# Altium PCB MSA4.PcbDoc
Units mil, origin at the board's own origin, x right, y up, seen from the top; angles counter-clockwise.
Board outline 3760 x 4510 mil, 4 copper layers (Top Layer 1, Top Layer, Bottom Layer, Bottom Layer 1), stack 23.756 mil thick; 57 components, 65 nets, 424 pads, 183 vias.
Unrouted connection lines stored in the file: 5.
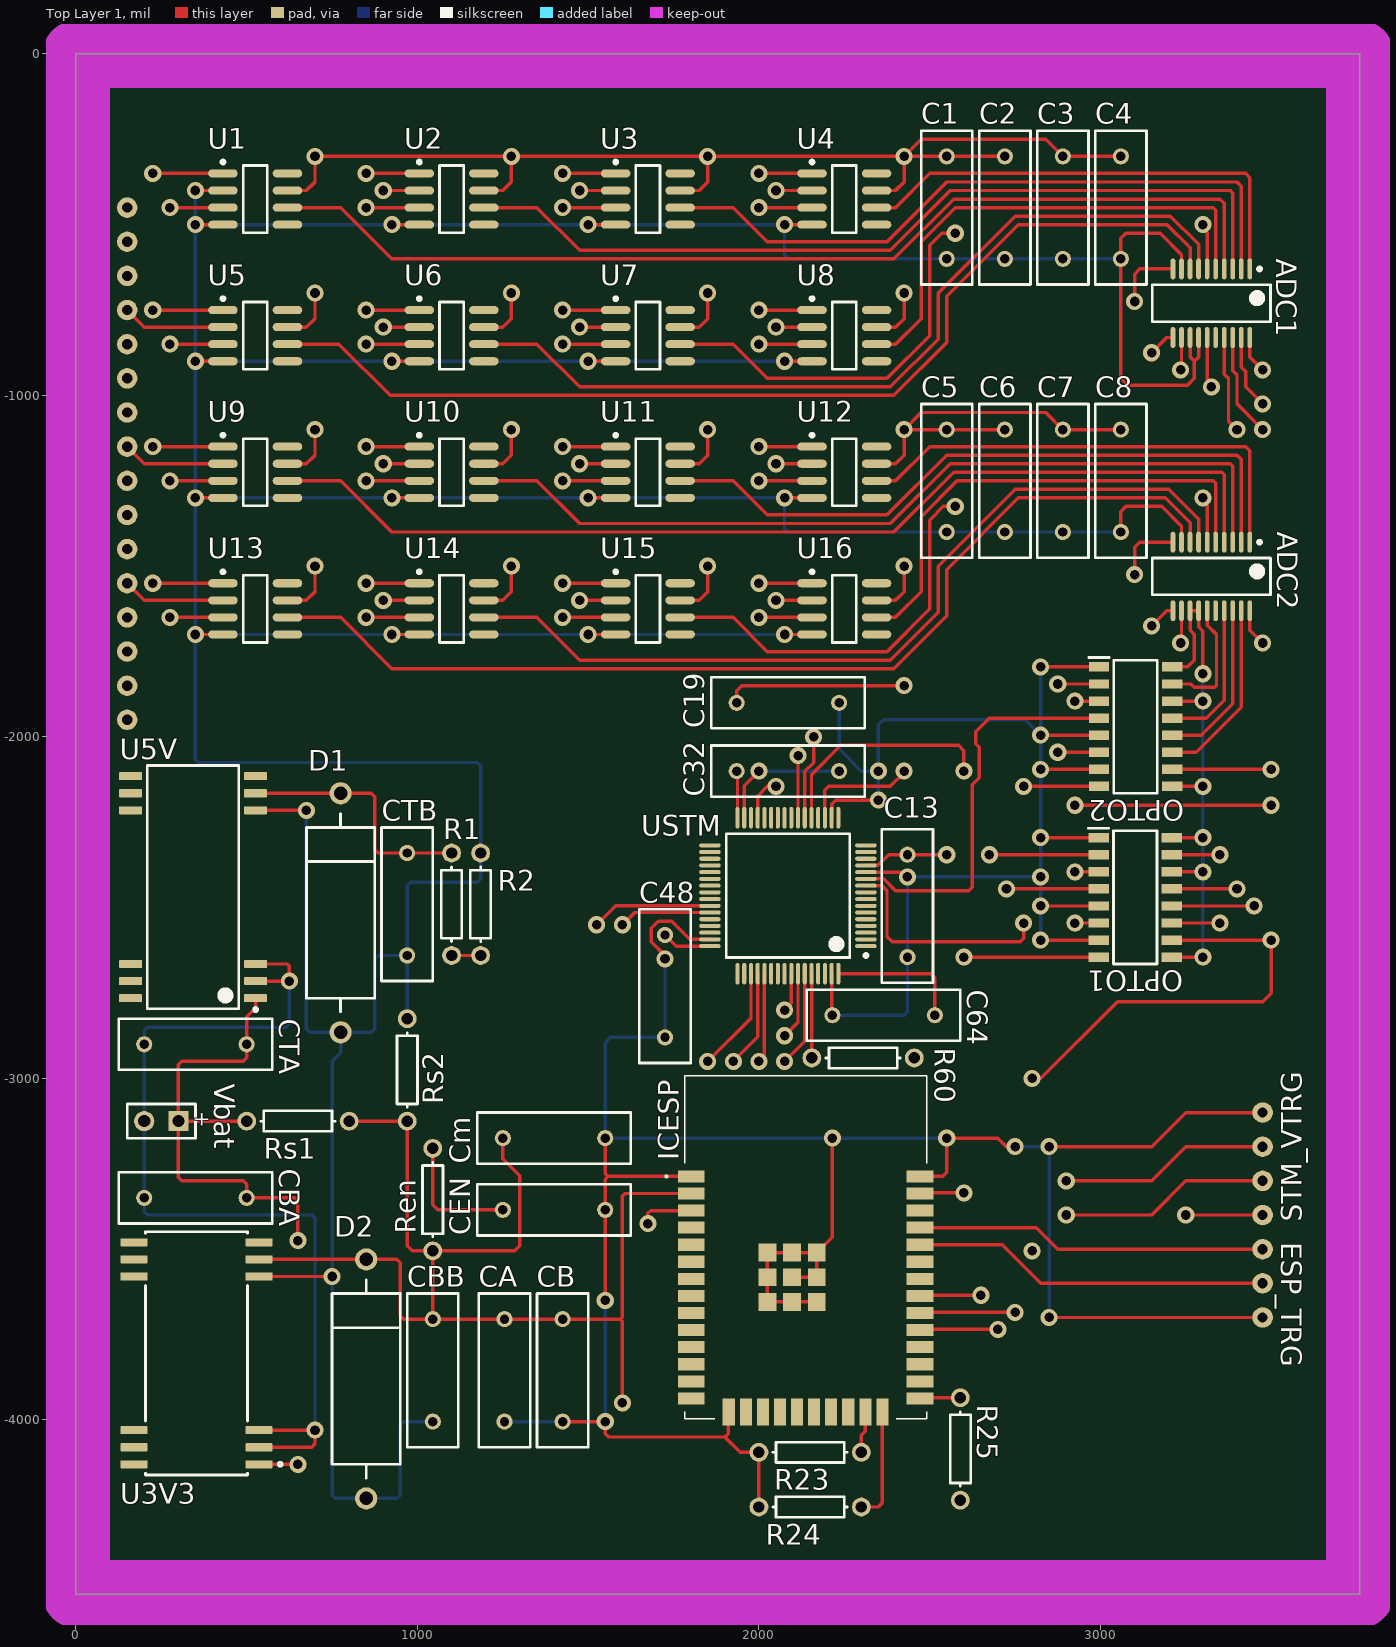
[diagram p0: Top Layer 1 view]
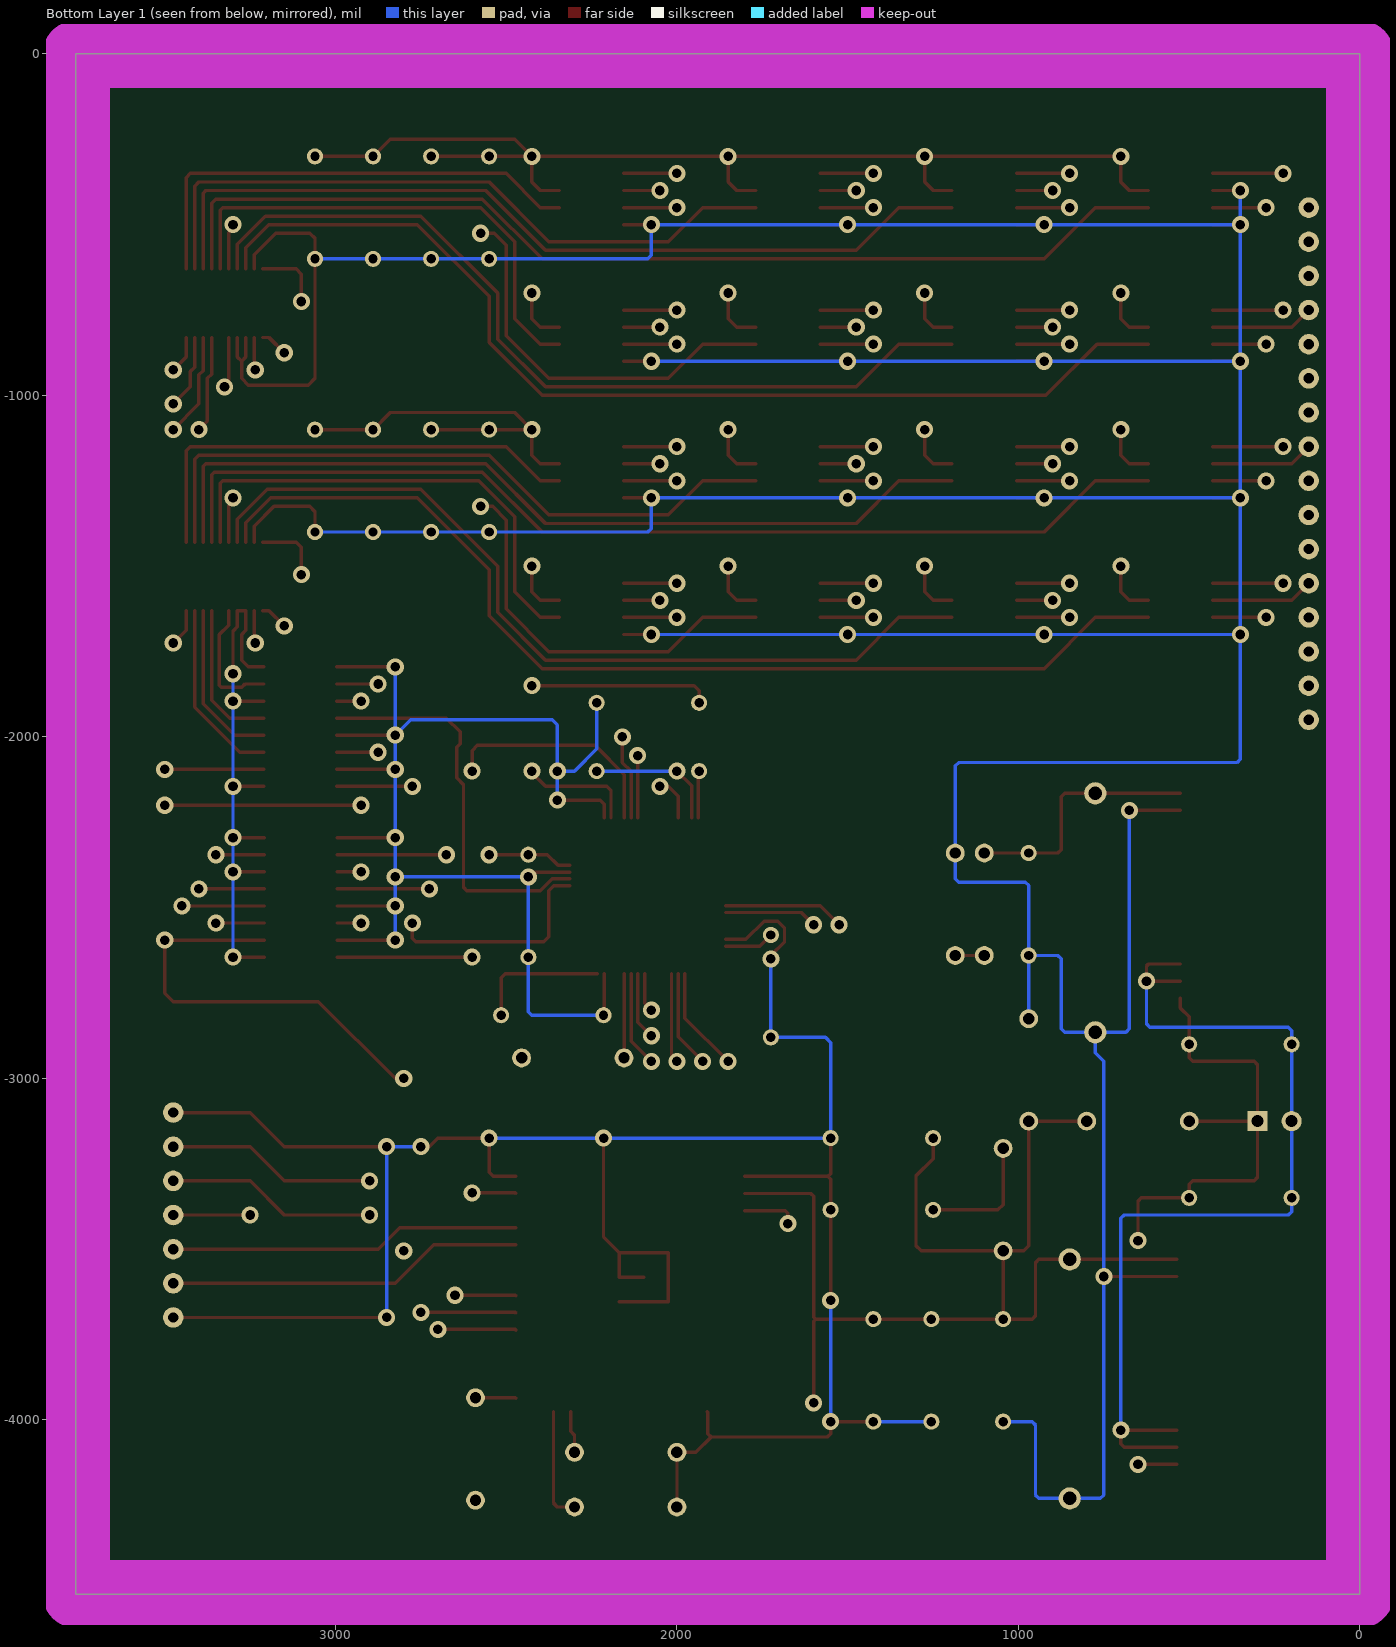
[diagram p1: Bottom Layer 1 view, seen from below]
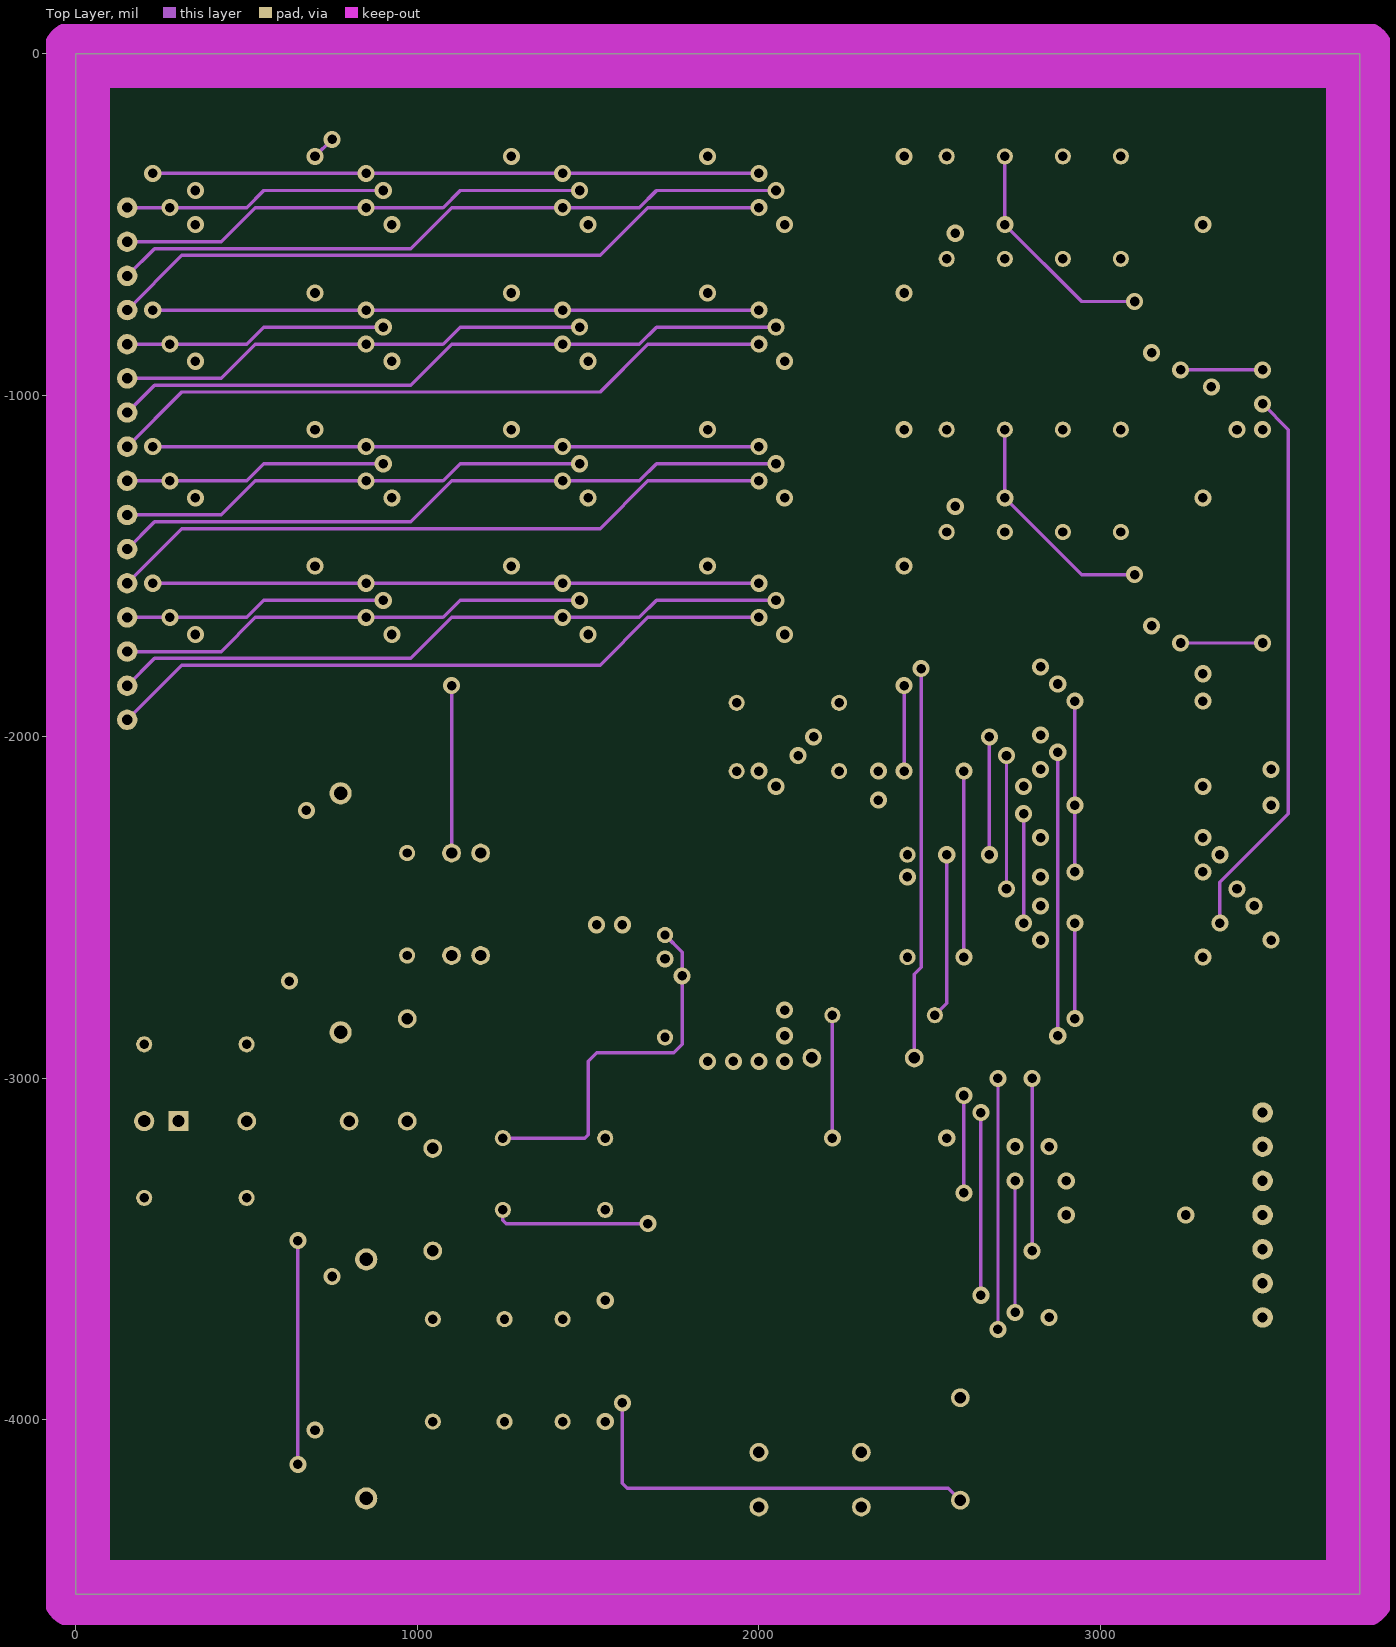
[diagram p2: Top Layer]
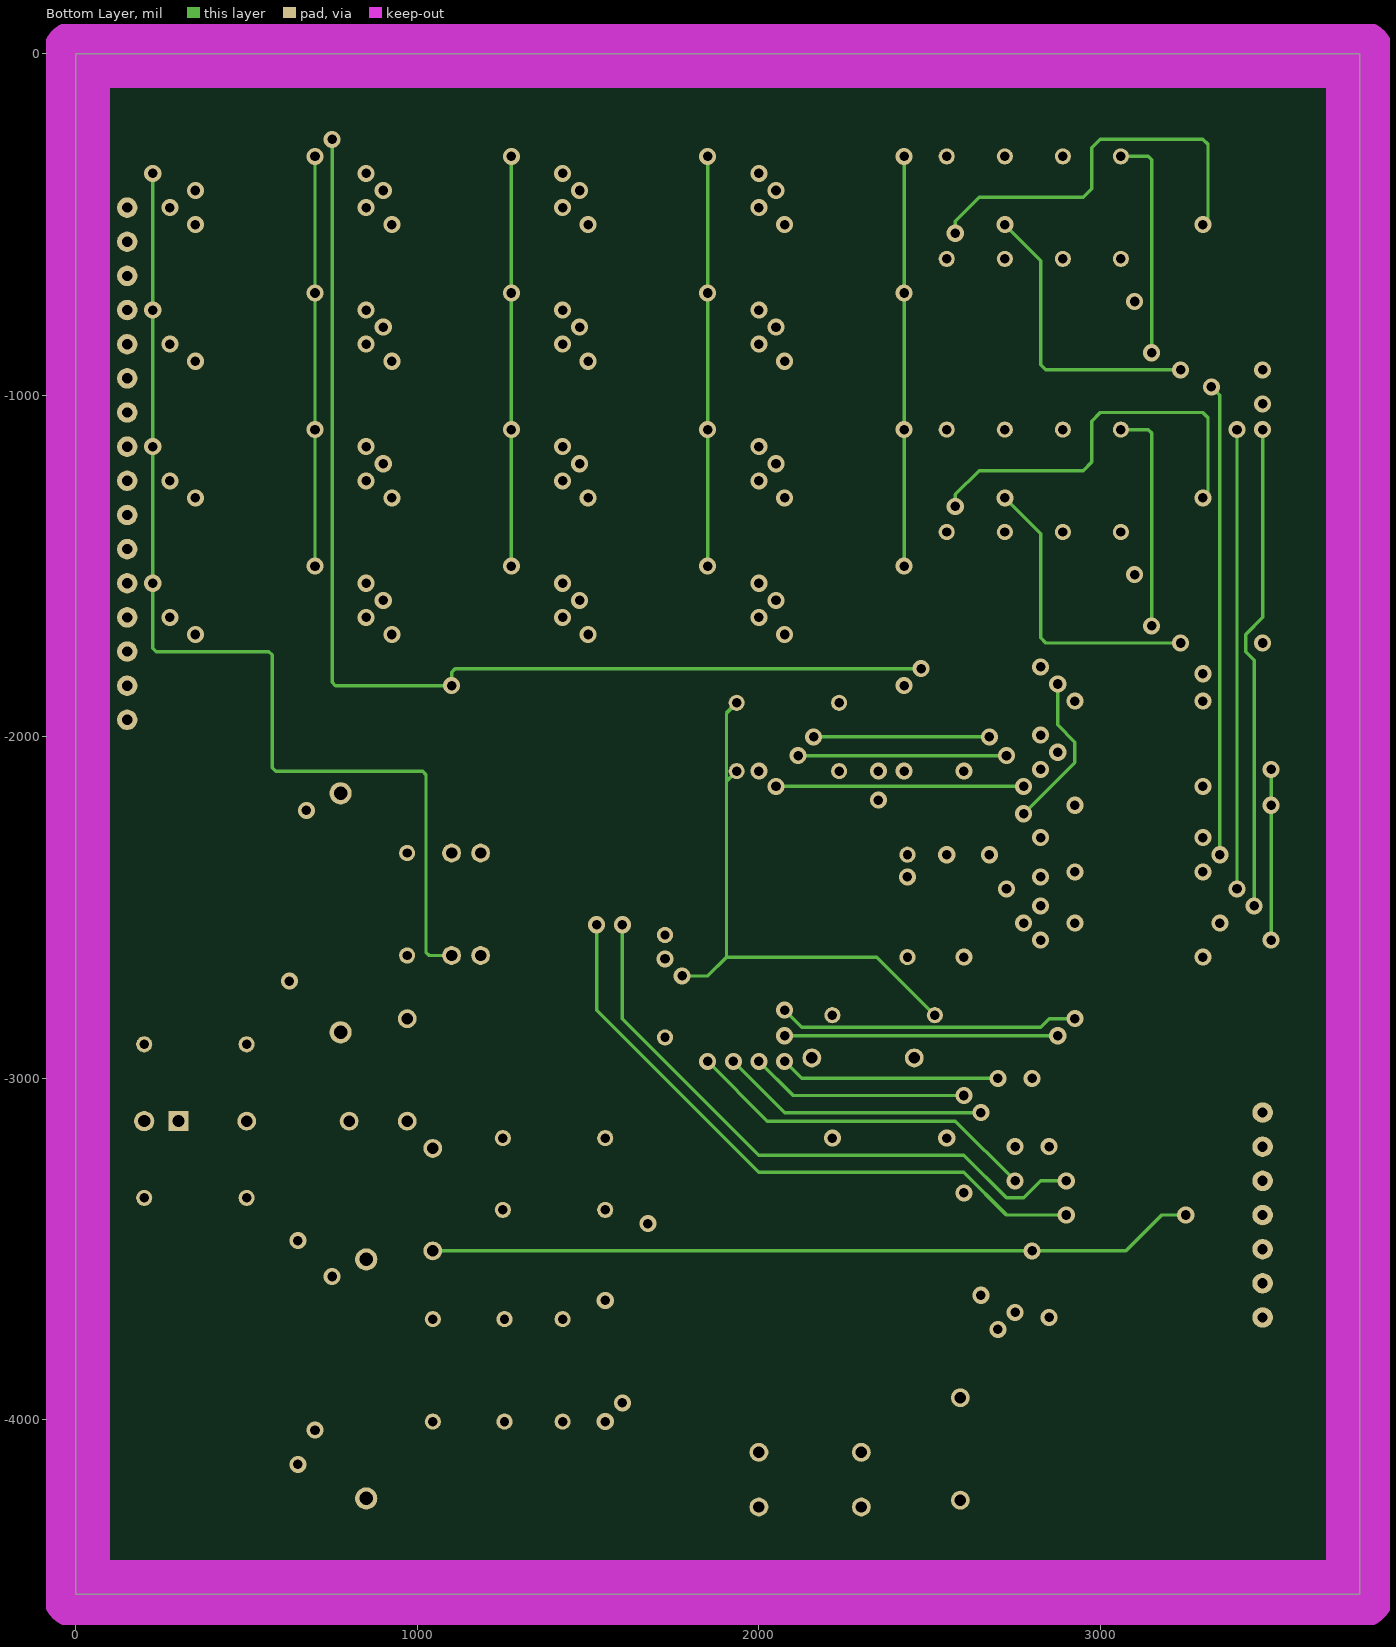
[diagram p3: Bottom Layer]

## Layer stack, top to bottom
Top Solder: solder mask 0.4, Solder Resist, Dk 3.5
Top Layer 1: signal copper 1.378
Dielectric 2: prepreg 2.8, PP-006, Dk 4.1
Top Layer: signal copper 1.4
Dielectric 1: dielectric 12.6, FR-4, Dk 4.8
Bottom Layer: signal copper 1.4
Dielectric 3: prepreg 2.8, PP-006, Dk 4.1
Bottom Layer 1: signal copper 1.378
Bottom Solder: solder mask 0.4, Solder Resist, Dk 3.5

## Board outline
0,-4510 3760,-4510 3760,0 0,0

## Design rules (kind name [scope] priority, off if disabled: settings)
Clearance [All] p1: gap=5 ignorepadtopadclearanceinfootprint=FALSE except(0: Arc-Hole Track-Hole SMDPad-Hole THPad-Hole Via-Hole Fill-Hole Poly-Hole Region-Hole Text-Hole)
MinimumSolderMaskSliver [All] p1: minsoldermaskwidth=3
PolygonConnect [All] p1: connectstyle=Relief reliefconductorwidth=10 reliefentries=4 polygonreliefangle="90 Angle" airgapwidth=10
RoutingVias [All] p1: holewidth=28 width=50 viastyle="Through Hole" minholewidth=28 minwidth=50 maxholewidth=28 maxwidth=50
SilkToSilkClearance [All] p1: silktosilkclearance=3
SilkToSolderMaskClearance [IsPad] p1: minsilkscreentomaskgap=3 clearancetoexposedcopper=TRUE
SolderMaskExpansion [All] p1: expansion=4 istentingtop=FALSE
UnRoutedNet [All] p1: checkbadconnections=TRUE
Width [All] p1: maxlimit=10 minlimit=10 preferedwidth=10
26 further rules are at their usual default settings.

## Components (designator, comment, footprint, x,y, rotation, side; value= is the part's Value field where it differs from the comment)
ADC1 "ADS8344E" TI-DBQ20_L 3325,-730 r270 top
ADC2 "ADS8344E" TI-DBQ20_L 3325,-1530 r270 top
C1 "Cap" RAD-0.3 2550,-450 r90 top value=100nF
C2 "Cap" RAD-0.3 2720,-450 r90 top value=2200nF
C3 "Cap" RAD-0.3 2890,-450 r90 top value=1000nF
C4 "Cap" RAD-0.3 3060,-450 r90 top value=2200nF
C5 "Cap" RAD-0.3 2550,-1250 r90 top value=100nF
C6 "Cap" RAD-0.3 2720,-1250 r90 top value=2200nF
C7 "Cap" RAD-0.3 2890,-1250 r90 top value=1000nF
C8 "Cap" RAD-0.3 3060,-1250 r90 top value=2200nF
C13 "Cap" RAD-0.3 2435,-2495 r90 top value=100nF
C19 "Cap" RAD-0.3 2085,-1900 r180 top value=100nF
C32 "Cap" RAD-0.3 2085,-2100 r180 top value=100nF
C48 "Cap" RAD-0.3 1725,-2730 r90 top value=100nF
C64 "Cap" RAD-0.3 2365,-2815 r0 top value=100nF
CA "Cap" RAD-0.3 1255,-3855 r90 top value=10000nF
CB "Cap" RAD-0.3 1425,-3855 r90 top value=100nF
CBA "Cap" RAD-0.3 350,-3350 r0 top value=2.2uF
CBB "Cap" RAD-0.3 1045,-3855 r90 top value=1uF
CEN "Cap" RAD-0.3 1400,-3385 r180 top value=100nF
Cm "Cap" RAD-0.3 1400,-3175 r180 top value=4.7uF
CTA "Cap" RAD-0.3 350,-2900 r0 top value=2.2uF
CTB "Cap" RAD-0.3 970,-2490 r90 top value=1uF
D1 "D Zener" DIODE-0.7 775,-2515 r90 top
D2 "D Zener" DIODE-0.7 850,-3880 r90 top
ICESP "ESP32-WROOM-32D_M113DH3200PH3Q0_" ESP32WROOM32DM113DH3200PH3Q0 2136.61,-3494.06 r0 top
OPTO1 "ACSL-6410-00TE" SOIC127P599X152-16N 3102.05,-2470 r0 top
OPTO2 "ACSL-6410-00TE" SOIC127P599X152-16N 3102.95,-1970 r0 top
R1 "Res1" AXIAL-0.3 1100,-2490 r90 top value=10K
R2 "Res1" AXIAL-0.3 1185,-2490 r270 top value=10K
R23 "Res1" AXIAL-0.3 2150,-4095 r0 top value=10K
R24 "Res1" AXIAL-0.3 2150,-4255 r0 top value=10K
R25 "Res1" AXIAL-0.3 2590,-4085 r270 top value=10K
R60 "Res1" AXIAL-0.3 2305,-2940 r0 top value=10K
Ren "Res1" AXIAL-0.3 1045,-3355 r90 top value=10K
Rs1 "Res1" AXIAL-0.3 650,-3125 r0 top value=33K
Rs2 "Res1" AXIAL-0.3 970,-2975 r90 top value=17K
U1 "LT1990ACS8#PBF" LT-S8-8_N 525,-425 r0 top
U2 "LT1990ACS8#PBF" LT-S8-8_N 1100,-425 r0 top
U3 "LT1990ACS8#PBF" LT-S8-8_N 1675,-425 r0 top
U3V3 "DCP020503U" FP-DVB0012A-MFG 353.07,-3805 r180 top
U4 "LT1990ACS8#PBF" LT-S8-8_N 2250,-425 r0 top
U5 "LT1990ACS8#PBF" LT-S8-8_N 525,-825 r0 top
U5V "DCP020505U/1K" DVB0012A_L 343.07,-2440 r180 top
U6 "LT1990ACS8#PBF" LT-S8-8_N 1100,-825 r0 top
U7 "LT1990ACS8#PBF" LT-S8-8_N 1675,-825 r0 top
U8 "LT1990ACS8#PBF" LT-S8-8_N 2250,-825 r0 top
U9 "LT1990ACS8#PBF" LT-S8-8_N 525,-1225 r0 top
U10 "LT1990ACS8#PBF" LT-S8-8_N 1100,-1225 r0 top
U11 "LT1990ACS8#PBF" LT-S8-8_N 1675,-1225 r0 top
U12 "LT1990ACS8#PBF" LT-S8-8_N 2250,-1225 r0 top
U13 "LT1990ACS8#PBF" LT-S8-8_N 525,-1625 r0 top
U14 "LT1990ACS8#PBF" LT-S8-8_N 1100,-1625 r0 top
U15 "LT1990ACS8#PBF" LT-S8-8_N 1675,-1625 r0 top
U16 "LT1990ACS8#PBF" LT-S8-8_N 2250,-1625 r0 top
USTM "STM32F401RET6" STM-LQFP64_L 2085,-2465 r180 top
Vbat "Battery" BAT-2 250,-3125 r180 top

## Footprints (in the part's own frame and the unit in brackets; to place one, negate y for a bottom-side part, rotate by r counter-clockwise, add the part's x,y. Pads: shape width x height; smd on the part's side, far side on the other; paste and mask are expansions set on the pad)
AXIAL-0.3 [mm] "Axial Device, Thru-Hole; 2 Leads; 0.3 in Pin Spacing"
  round 1.4 hole 0.85: 1(-3.81,0) 2(3.81,0)
  silkscreen extent -2.77,-0.76 2.77,0.76
BAT-2 [mm] "Battery; 2 Leads"
  rect 1.5x1.5 hole 0.9: 1(-1.27,0)
  round 1.5 hole 0.9: 2(1.27,0)
  silkscreen extent -2.54,-1.27 2.54,1.27
DIODE-0.7 [mm] "Diode, Thru-Hole; 2 Leads; 0.7 in Pin Spacing"
  round 1.65 hole 1: 1(-8.89,0) 2(8.89,0)
  silkscreen extent -7.37,-2.54 7.37,2.54
DVB0012A_L [mm] "SOIC, 12-Leads, Body 7.6x18.1mm, Pitch 1.27mm, IPC High Density"
  rrect17% 1.7x0.6 smd: 1(-4.65,8.255) 2(-4.65,6.985) 3(-4.65,5.715) 12(-4.65,-5.715) 13(-4.65,-6.985) 14(-4.65,-8.255) 15(4.65,-8.255) 16(4.65,-6.985) 17(4.65,-5.715) 26(4.65,5.715) 27(4.65,6.985) 28(4.65,8.255)
  silkscreen extent -4.78,-9.05 3.4,9.23, body extent -3.8,-9.05 3.8,9.05, height 2.65
ESP32WROOM32DM113DH3200PH3Q0 [mm]
  rect 2x0.9 smd: 1(-8.5,5.26) 2(-8.5,3.99) 3(-8.5,2.72) 4(-8.5,1.45) 5(-8.5,0.18) 6(-8.5,-1.09) 7(-8.5,-2.36) 8(-8.5,-3.63) 9(-8.5,-4.9) 10(-8.5,-6.17) 11(-8.5,-7.44) 12(-8.5,-8.71) 13(-8.5,-9.98) 14(-8.5,-11.25) 25(8.5,-11.25) 26(8.5,-9.98) 27(8.5,-8.71) 28(8.5,-7.44) 29(8.5,-6.17) 30(8.5,-4.9) 31(8.5,-3.63) 32(8.5,-2.36) 33(8.5,-1.09) 34(8.5,0.18) 35(8.5,1.45) 36(8.5,2.72) 37(8.5,3.99) 38(8.5,5.26)
  rect 0.9x2 smd: 15(-5.715,-12.25) 16(-4.445,-12.25) 17(-3.175,-12.25) 18(-1.905,-12.25) 19(-0.635,-12.25) 20(0.635,-12.25) 21(1.905,-12.25) 22(3.175,-12.25) 23(4.445,-12.25) 24(5.715,-12.25)
  rect 1.33x1.33 smd: 39(-2.835,-0.405) 40(-2.835,-2.24) 41(-2.835,-4.075) 42(-1,-4.075) 43(0.835,-4.075) 44(0.835,-2.24) 45(0.835,-0.405) 46(-1,-0.405) 47(-1,-2.24)
  silkscreen extent -10.4,-12.75 9,12.75, body extent -9,-12.75 9,12.75, height 3.1
FP-DVB0012A-MFG [mm]
  rrect17% 2x0.6 smd paste+0 mask+0: 1(-4.65,8.255) 2(-4.65,6.985) 3(-4.65,5.715) 12(-4.65,-5.715) 13(-4.65,-6.985) 14(-4.65,-8.255) 15(4.65,-8.255) 16(4.65,-6.985) 17(4.65,-5.715) 26(4.65,5.715) 27(4.65,6.985) 28(4.65,8.255)
  silkscreen extent -6.35,-9.05 3.8,9.05, body extent -5.75,-9.15 5.75,9.15, height 0.25
LT-S8-8_N [mm] "SOIC, 8-Leads, Body 4.9x3.9mm, Pitch 1.27mm, IPC Medium Density"
  oval 2.2x0.6 smd: 1(-2.4,1.905) 2(-2.4,0.635) 3(-2.4,-0.635) 4(-2.4,-1.905) 5(2.4,-1.905) 6(2.4,-0.635) 7(2.4,0.635) 8(2.4,1.905)
  silkscreen extent -2.52,-2.5 0.9,2.88, body extent -2,-2.5 2,2.5, height 1.76
RAD-0.3 [mm] "Radial Cap, Thru-Hole; 2 Leads; 0.3 in Pin Spacing"
  round 1.2 hole 0.7: 1(-3.81,0) 2(3.81,0)
  silkscreen extent -5.71,-1.91 5.71,1.91
SOIC127P599X152-16N [mm]
  rect 1.513x0.7 smd: 1(-2.719,4.445) 2(-2.719,3.175) 3(-2.719,1.905) 4(-2.719,0.635) 5(-2.719,-0.635) 6(-2.719,-1.905) 7(-2.719,-3.175) 8(-2.719,-4.445) 9(2.719,-4.445) 10(2.719,-3.175) 11(2.719,-1.905) 12(2.719,-0.635) 13(2.719,0.635) 14(2.719,1.905) 15(2.719,3.175) 16(2.719,4.445)
  silkscreen extent -3.47,-4.95 1.61,5.15, body extent -3,-4.95 3,4.95, height 1.52
STM-LQFP64_L [mm] "QFP, 64-Leads, Body 10x10mm, Pitch 0.5mm, IPC High Density"
  oval 1.6x0.3 smd: 1(-5.8,3.75) 2(-5.8,3.25) 3(-5.8,2.75) 4(-5.8,2.25) 5(-5.8,1.75) 6(-5.8,1.25) 7(-5.8,0.75) 8(-5.8,0.25) 9(-5.8,-0.25) 10(-5.8,-0.75) 11(-5.8,-1.25) 12(-5.8,-1.75) 13(-5.8,-2.25) 14(-5.8,-2.75) 15(-5.8,-3.25) 16(-5.8,-3.75) 33(5.8,-3.75) 34(5.8,-3.25) 35(5.8,-2.75) 36(5.8,-2.25) 37(5.8,-1.75) 38(5.8,-1.25) 39(5.8,-0.75) 40(5.8,-0.25) 41(5.8,0.25) 42(5.8,0.75) 43(5.8,1.25) 44(5.8,1.75) 45(5.8,2.25) 46(5.8,2.75) 47(5.8,3.25) 48(5.8,3.75)
  oval 0.3x1.6 smd: 17(-3.75,-5.8) 18(-3.25,-5.8) 19(-2.75,-5.8) 20(-2.25,-5.8) 21(-1.75,-5.8) 22(-1.25,-5.8) 23(-0.75,-5.8) 24(-0.25,-5.8) 25(0.25,-5.8) 26(0.75,-5.8) 27(1.25,-5.8) 28(1.75,-5.8) 29(2.25,-5.8) 30(2.75,-5.8) 31(3.25,-5.8) 32(3.75,-5.8) 49(3.75,5.8) 50(3.25,5.8) 51(2.75,5.8) 52(2.25,5.8) 53(1.75,5.8) 54(1.25,5.8) 55(0.75,5.8) 56(0.25,5.8) 57(-0.25,5.8) 58(-0.75,5.8) 59(-1.25,5.8) 60(-1.75,5.8) 61(-2.25,5.8) 62(-2.75,5.8) 63(-3.25,5.8) 64(-3.75,5.8)
  silkscreen extent -5.93,-4.6 4.6,4.6, body extent -5,-5 5,5, height 1.6
TI-DBQ20_L [mm] "SOP, 20-Leads, Body 8.65x3.9mm, Pitch 0.635mm, IPC High Density"
  oval 1.55x0.35 smd: 1(-2.55,2.857) 2(-2.55,2.222) 3(-2.55,1.587) 4(-2.55,0.952) 5(-2.55,0.317) 6(-2.55,-0.318) 7(-2.55,-0.953) 8(-2.55,-1.588) 9(-2.55,-2.223) 10(-2.55,-2.858) 11(2.55,-2.857) 12(2.55,-2.222) 13(2.55,-1.587) 14(2.55,-0.952) 15(2.55,-0.317) 16(2.55,0.318) 17(2.55,0.953) 18(2.55,1.588) 19(2.55,2.223) 20(2.55,2.858)
  silkscreen extent -2.67,-4.4 1.38,4.4, body extent -2,-4.4 2,4.4, height 1.75

## Part data
ADC1 ADC2: library part CMP-0003-01312-1, "16-Bit, 8-Channel Serial Output Sampling ADC, -40 to 85 degC, 20-pin SOP (DBQ20), Green (RoHS & no Sb/Br)", Analog Voltage AV/DD(Max)(V)=5.25, Analog Voltage AV/DD(Min)(V)=2.7, Manufacturer="Texas Instruments", # Input Channels=8, Architecture=SAR, Code_JEDEC=MO-137, ComponentLink1Description="Manufacturer URL", ComponentLink1URL=http://www.ti.com/, ComponentLink2Description=Datasheet, ComponentLink2URL=http://www.ti.com/general/docs/lit/getliterature.tsp?genericPartNumber=ADS8344&fileType=pdf, ComponentLink3Description="Package Specification", ComponentLink3URL=http://www.ti.com/litv/pdf/mpds210a, DatasheetVersion=SBAS139E, Digital Supply(Max)(V)=5.25, Digital Supply(Min)(V)=2.7, Eco-Plan="Green (RoHS & no Sb/Br)", INL(Max)(+/-LSB)=6, Interface="Serial SPI", Mounting Technology="Surface Mount", PackageDescription="20-Pin Plastic Small Outline, Body 8.65 x 3.9 mm, Pitch 0.635 mm", PackageReference=DBQ20, PackageVersion="4073301-3/H, 10/2008", PartNumber=ADS8344E, Resolution(Bits)=16, Sample Rate (max)(SPS)=100k, SFDR(dB)=92, SINAD(dB)=86, SubFamily="Precision ADC (<=10MSPS)"
C1 C2 C3 C4 C5 C6 C7 C8 C13 C19 C32 C48 C64 CA CB CBA CBB CEN Cm CTA CTB: "Capacitor", LatestRevisionDate=17-Jul-2002, LatestRevisionNote="Re-released for DXP Platform.", PackageDescription="Radial Cap, Thru-Hole; 2 Leads; 0.3 in Pin Spacing", PackageReference=RAD-0.3, Published=8-Jun-2000, Publisher="Altium Limited"
D1 D2: "Zener Diode", LatestRevisionDate=17-Jul-2002, LatestRevisionNote="Re-released for DXP Platform.", PackageDescription="Diode, Thru-Hole; 2 Leads; 0.7 in Pin Spacing", PackageReference=DIODE-0.7, Published=8-Jun-2000, Publisher="Altium Limited"
ICESP: "Integrated Circuit", Manufacturer_Name="Espressif Systems", Manufacturer_Part_Number=ESP32-WROOM-32D(M113DH3200PH3Q0), Datasheet Link=https://www.mouser.in/datasheet/2/891/esp32-wroom-32d_esp32-wroom-32u_datasheet_en-1365844.pdf, Height=3.2mm
OPTO1 OPTO2: "Integrated Circuit", Manufacturer_Name="Avago Technologies", Mouser Part Number=630-ACSL-6410-00TE, Datasheet Link=https://docs.broadcom.com/docs/AV02-0235EN, Height=1.524mm, Manufacturer_Part_Number=ACSL-6410-00TE, Mouser Price/Stock=https://www.mouser.co.uk/ProductDetail/Broadcom-Avago/ACSL-6410-00TE?qs=RuhU64sK2%252Btb4Jggwyh%252BkA%3D%3D
R1 R2 R23 R24 R25 R60 Ren Rs1 Rs2: "Resistor", LatestRevisionDate=17-Jul-2002, LatestRevisionNote="Re-released for DXP Platform.", PackageDescription="Axial Device, Thru-Hole; 2 Leads; 0.3 in Pin Spacing", PackageReference=AXIAL-0.3, Published=8-Jun-2000, Publisher="Altium Limited"
U1 U2 U3 U4 U5 U6 U7 U8 U9 U10 U11 U12 U13 U14 U15 U16: library part CMP-0359-03362-2, "Single Channel, Integrated Resistors, Micropower, Difference Amplifier, 0.1 MHz Typical GBW, 0.55 V/us Typical SR, 2.4 to 36 V, 8-Pin SOIC (S8-8), Commercial, Pb-Free", Linear Technology Part Number=LT1990, Manufacturer="Linear Technology", Channels (#)=1, ComponentLink1Description="Manufacturer URL", ComponentLink1URL=http://www.linear.com/, ComponentLink2Description=Datasheet, ComponentLink2URL=http://cds.linear.com/docs/en/datasheet/1990fb.pdf, ComponentLink3Description="Package Specification", ComponentLink3URL=http://cds.linear.com/docs/en/packaging/05081610_G_SO8.pdf, DatasheetVersion="Rev. B", GBW (MHz) Typical=0.1, Is (mA) Typical=0.14, Mounting Technology="Surface Mount", PackageDescription="8-Pin Plastic Small Outline, Body 4.9 x 3.9 mm, Pitch 1.27 mm", PackageReference=LT-S8-8, PackageVersion="Rev G", PartNumber=LT1990ACS8#PBF, RevisionNote="URLs updated", RoHS=Pb-Free, SR (V/us) Typical=0.55, Type=SGA, Vos (mV) Guaranteed=5.2, Vos (mV) Typical=0.9, Vs Max (V)=36, Vs Min (V)=2.4
U3V3: library part CMP-0387-00169-3, "DC DC CONVERTER 3.3V 2W", Case/Package=SOP, Current - Output 1=606mA, Frequency=800kHz, Isolation Voltage=1kV, Max Input Voltage=5.5V, Max Operating Temperature=85°C, Max Output Power=2W, Max Output Voltage=3.46V, Max Power Dissipation=59mW, Min Input Voltage=4.5V, Min Operating Temperature=-40°C, Min Output Voltage=3.13V, Nominal Output Voltage=3.3V, Package Quantity=28, Quiescent Current=18mA, Switching Frequency=400kHz, Efficiency=74%, Features=OTP, Height=0.1inch, Lead Free="Lead Free", Length=0.71inch, Max Output Current=606mA, Max Supply Voltage=5.5V, Min Supply Voltage=4.5V, Number of Outputs=1, Number of Pins=12, Output Current=606mA, Output Power=2W, Output Type=Fixed, Output Voltage=3.3V, Packaging=Rail/Tube, Radiation Hardening=No, REACH SVHC="No SVHC", RoHS Compliant=Yes, Termination=SMD/SMT, Voltage - Output 1=3.3V, Width=0.3inch
U5V: library part CMP-0387-00170-2, "Miniature, 2 W Isolated Unregulated DC-DC Converter, -40 to 85 degC, 12-pin SOP (DVB12), Pb-Free (RoHS)", Manufacturer="Texas Instruments", Code_JEDEC=MS-013-AE, ComponentLink1Description="Manufacturer URL", ComponentLink1URL=http://www.ti.com/, ComponentLink2Description=Datasheet, ComponentLink2URL=http://www.ti.com/general/docs/lit/getliterature.tsp?genericPartNumber=DCP020505&fileType=pdf, ComponentLink3Description="Package Specification", ComponentLink3URL=http://www.ti.com/lit/ml/mpds106a/mpds106a.pdf, ComponentLink4Description="URL Link1", ComponentLink4URL="Samples URL:http://www.ti.com/product/dcp020505#samples", DatasheetVersion=SBVS011K, Eco-Plan="Pb-Free (RoHS)", Iout(Max)(A)=0.4, Mounting Technology="Surface Mount", PackageDescription="12-Pin Plastic Small Outline, Body 17.9 x 7.5 mm", PackageReference=DVB0012A, PackageVersion=4202104/B, PartNumber=DCP020505U/1K, Regulated Outputs(#)=1, SubFamily="1 W & 2 W Miniature", Vin(Max)(V)=5.5, Vin(Min)(V)=4.5, Vout(Max)(V)=5.25, Vout(Min)(V)=4.75
USTM: library part CMP-0243-00148-1, "ARM Cortex-M4 32-bit MCU+FPU, 512 KB Flash, 96 KB Internal RAM, 50 I/Os, 64-Pin LQFP, -40 to 85 degC, Tray", I/Os (High Current)=50, Operating Frequency(F) (Processor speed) (MHz)=84, Package Description=LQFP64, Package Reference="64-Pin Low-profile Quad Flat Package, Body 10 x 10 mm, Pitch 0.5 mm", Supply Voltage(Vcc) min (V)=1.7, ComponentLink1Description="Manufacturer URL", ComponentLink1URL=http://www.st.com/, ComponentLink2Description=Datasheet, ComponentLink2URL=http://www.st.com/st-web-ui/static/active/en/resource/technical/document/datasheet/DM00102166.pdf, Core="ARM Cortex-M4", DatasheetVersion="Rev. 3", FLASH Size (Prog) (kB)=512, Internal RAM Size (kB)=96, Mounting Technology="Surface Mount", Packing=Tray
Vbat: "Multicell Battery", LatestRevisionDate=17-Jul-2002, LatestRevisionNote="Re-released for DXP Platform.", PackageDescription="Battery; 2 Leads", PackageReference=BAT-2, Published=24-Mar-1999, Publisher="Altium Limited"

## Free pads (board coordinates)
  round 60 hole 30: 2(150,-1950) 3(150,-1850) 4(150,-1750) 5(150,-1650) 6(150,-1550) 7(150,-1450) 8(150,-1350) 9(150,-1250) 10(150,-1150) 11(150,-1050) 12(150,-950) 13(150,-850) 14(150,-750) 15(150,-650) 16(150,-550) 17(150,-450) 18(3475,-3700) 19(3475,-3600) 20(3475,-3500) 21(3475,-3300) 22(3475,-3200) 23(3475,-3100) 24(3475,-3400)

## Via types
v1: diameter 50, hole 28, Top Layer 1 to Bottom Layer 1, 168 vias
v2: diameter 50, hole 28, Top Layer to Bottom Layer, 15 vias

## Nets (pads, with @x,y where several pads share a name; then routed paths per layer and width w, separated by ;. In a path a pad name is that pad's centre, name@x,y a point inside that pad or via, vN(x,y) a via of type N, cw(c..) or ccw(c..) an arc to the next point about the centre after c; other vN are vias at no path point)
batGND: CBA.1 CTA.1 U3V3.2 U3V3.3 U5V.2 U5V.3 Vbat.2 | length 2832.7
  Top Layer 1 w10: U5V.2 v1(625,-2715) 625,-2670.86 619.14,-2665 U5V.3 ; U3V3.2 690,-4080 700,-4070 v1(700,-4030) U3V3.3
  Bottom Layer 1 w10: v1(625,-2715) 625,-2840 615,-2850 210,-2850 200,-2860 CTA.1 Vbat.2 CBA.1 200,-3390 210,-3400 690,-3400 700,-3410 v1(700,-4030)
chip1: ADC1.18 OPTO1.12 | length 1972.8
  Top Layer 1 w10: OPTO1.12 v1(3450,-2495) ; ADC1.18 3387.5,-927.5 3400,-940 3400,-1025 v1(3475,-1100)
  Bottom Layer w10: v1(3450,-2495) 3450,-1775 3425,-1750 3425,-1700 3475,-1650 v1(3475,-1100)
chip2: ADC2.18 OPTO2.12 | length 487.9
  Top Layer 1 w10: OPTO2.12 3295,-1995 3387.5,-1902.5 ADC2.18
csESP: ICESP.29 USTM.59 | length 1891.4
  Top Layer 1 w10: v1(2075,-2950) 2134.21,-2890.79 USTM.59 ; ICESP.29 2473.23,-3735 v1(2700,-3735)
  Top Layer w10: v1(2700,-3735) v2(2700,-3000)
  Bottom Layer w10: v1(2075,-2950) 2125,-3000 v2(2700,-3000)
csOPTO1: OPTO1.6 USTM.57 | length 1345.9
  Top Layer 1 w10: v1(2075,-2800) 2094.84,-2780.16 USTM.57 ; v1(2925,-2545) OPTO1.6
  Top Layer w10: v2(2925,-2825) v1(2925,-2545)
  Bottom Layer w10: v1(2075,-2800) 2125,-2850 2825,-2850 2850,-2825 v2(2925,-2825)
csOPTO2: OPTO2.6 USTM.58 | length 1948.9
  Top Layer 1 w10: v1(2075,-2875) 2114.53,-2835.47 USTM.58 ; v1(2875,-2045) OPTO2.6
  Top Layer w10: v2(2875,-2875) v1(2875,-2045)
  Bottom Layer w10: v1(2075,-2875) v2(2875,-2875)
dclk: ADC1.19 ADC2.19 OPTO1.11 OPTO2.11 | length 2534.8
  Top Layer 1 w10: OPTO1.11 v1(3350,-2545) ; OPTO2.11 3280,-2045 3412.5,-1912.5 ADC2.19 ; ADC1.19 3412.5,-917.5 3425,-930 3425,-975 v1(3475,-1025)
  Top Layer w10: v1(3350,-2545) 3350,-2425 3550,-2225 3550,-1100 v1(3475,-1025)
din: ADC1.17 ADC2.17 OPTO1.13 OPTO2.13 | length 2257.4
  Top Layer 1 w10: OPTO1.13 v1(3400,-2445) ; OPTO2.13 3310,-1945 3362.5,-1892.5 ADC2.17 ; ADC1.17 3362.5,-937.5 3375,-950 3375,-1075 v1(3400,-1100)
  Bottom Layer w10: v1(3400,-2445) v1(3400,-1100)
dout: ADC1.15 ADC2.15 OPTO1.15 OPTO2.15 | length 2037.8
  Top Layer 1 w10: OPTO1.15 v1(3350,-2345) ; OPTO2.15 3265,-1845 3275,-1855 3334.14,-1855 3340,-1849.14 3340,-1700 3312.5,-1672.5 ADC2.15 ; ADC1.15 3312.5,-962.5 v1(3325,-975)
  Bottom Layer w10: v1(3325,-975) 3350,-1000 v1(3350,-2345)
ESPuartRX: ICESP.34 pad.19 | length 1050.6
  Top Layer 1 w10: ICESP.34 2711.97,-3486.97 2825,-3600 pad.19
ESPuartTX: ICESP.35 pad.20 | length 1029.8
  Top Layer 1 w10: ICESP.35 2811.97,-3436.97 2875,-3500 pad.20
GND: ADC1.9 ADC1.13 ADC1.14 ADC2.9 ADC2.13 ADC2.14 C1.1 C2.1 C3.1 C4.1 C5.1 C6.1 C7.1 C8.1 CBB.1 CTB.1 D1.1 D2.1 OPTO1.9 OPTO1.14 OPTO1.16 OPTO2.9 OPTO2.14 OPTO2.16 R2.1 Rs2.2 U1.2 U1.4 U2.4 U3.4 U3V3.12 U4.4 U5.4 U5V.12 U6.4 U7.4 U8.4 U9.4 U10.4 U11.4 U12.4 U13.4 U14.4 U15.4 U16.4 | length 20399.5
  Top Layer 1 w10: v1(350,-1700) U13.4 ; v1(350,-1300) U9.4 ; v1(350,-900) U5.4 ; v1(350,-500) U1.4 ; v1(350,-400) U1.2 ; U5V.12 v1(675,-2215) ; U3V3.12 v1(750,-3580) ; v1(925,-1700) U14.4 ; v1(925,-1300) U10.4 ; v1(925,-900) U6.4 ; v1(925,-500) U2.4 ; v1(1500,-1700) U15.4 ; v1(1500,-1300) U11.4 ; v1(1500,-900) U7.4 ; v1(1500,-500) U3.4 ; v1(2075,-1700) U16.4 ; v1(2075,-1300) U12.4 ; v1(2075,-900) U8.4 ; v1(2075,-500) U4.4 ; C8.1 3060,-1340 3075,-1325 3180,-1325 3237.5,-1382.5 ADC2.9 ; OPTO1.9 v1(3300,-2645) ; OPTO1.14 v1(3300,-2395) ; OPTO1.16 v1(3300,-2295) ; OPTO2.9 v1(3300,-2145) ; OPTO2.14 v1(3300,-1895) ; OPTO2.16 3255,-1795 3275,-1775 3275,-1700 3262.5,-1687.5 ADC2.13 ADC2.14 3287.5,-1677.5 3300,-1690 v1(3300,-1815) ; ADC1.9 3237.5,-587.5 3175,-525 3075,-525 3060,-540 C4.1 3060,-950 3080,-970 3255,-970 3275,-950 3275,-900 ; ADC1.13 3262.5,-887.5 3275,-900 ; ADC1.14 3287.5,-887.5 3275,-900
  Bottom Layer 1 w10: v1(350,-400) v1(350,-500) ; v1(675,-2215) 675,-2855 685,-2865 D1.1 ; Rs2.2 CTB.1 ; CBB.1 960,-4005 950,-4015 950,-4220 940,-4230 D2.1 760,-4230 750,-4220 v1(750,-3580) 750,-2950 775,-2925 D1.1 ; v1(2075,-1700) v1(1500,-1700) v1(925,-1700) v1(350,-1700) ; v1(2075,-900) v1(1500,-900) v1(925,-900) v1(350,-900) ; C8.1 C7.1 C6.1 C5.1 2085,-1400 2075,-1390 v1(2075,-1300) v1(1500,-1300) v1(925,-1300) v1(350,-1300) ; C4.1 C3.1 C2.1 C1.1 2085,-600 2075,-590 v1(2075,-500) v1(1500,-500) v1(925,-500) v1(350,-500) ; v1(3300,-2645) v1(3300,-2395) v1(3300,-2295) v1(3300,-2145) v1(3300,-1895) v1(3300,-1815) ; v1(350,-1700) 350,-2065 360,-2075 1175,-2075 1185,-2085 R2.1 1185,-2415 1175,-2425 980,-2425 970,-2435 CTB.1 ; v1(350,-1700) v1(350,-1300) ; v1(350,-1300) v1(350,-900) ; v1(350,-900) v1(350,-500) ; D1.1 865,-2865 875,-2855 875,-2650 885,-2640 CTB.1
inp1m2: pad.17 U1.3 U2.2 | length 1031.7
  Top Layer 1 w10: v1(275,-450) U1.3 ; v1(900,-400) U2.2
  Top Layer w10: pad.17 v1(275,-450) 500,-450 550,-400 v1(900,-400)
inp2m3: pad.16 U2.3 U3.2 | length 1648.2
  Top Layer 1 w10: v1(850,-450) U2.3 ; v1(1475,-400) U3.2
  Top Layer w10: pad.16 425,-550 525,-450 v1(850,-450) 1075,-450 1125,-400 v1(1475,-400)
inp3m4: pad.15 U3.3 U4.2 | length 2264.6
  Top Layer 1 w10: v1(1425,-450) U3.3 ; v1(2050,-400) U4.2
  Top Layer w10: pad.15 230,-570 980,-570 1100,-450 v1(1425,-450) 1650,-450 1700,-400 v1(2050,-400)
inp4m5: pad.14 U4.3 U5.2 | length 2431
  Top Layer 1 w10: pad.14 200,-800 U5.2 ; v1(2000,-450) U4.3
  Top Layer w10: pad.14 310,-590 1535,-590 1675,-450 v1(2000,-450)
inp5m6: pad.13 U5.3 U6.2 | length 1031.7
  Top Layer 1 w10: v1(275,-850) U5.3 ; v1(900,-800) U6.2
  Top Layer w10: pad.13 v1(275,-850) 500,-850 550,-800 v1(900,-800)
inp6m7: pad.12 U6.3 U7.2 | length 1648.2
  Top Layer 1 w10: v1(850,-850) U6.3 ; v1(1475,-800) U7.2
  Top Layer w10: pad.12 425,-950 525,-850 v1(850,-850) 1075,-850 1125,-800 v1(1475,-800)
inp7m8: pad.11 U7.3 U8.2 | length 2264.6
  Top Layer 1 w10: v1(1425,-850) U7.3 ; v1(2050,-800) U8.2
  Top Layer w10: pad.11 230,-970 980,-970 1100,-850 v1(1425,-850) 1650,-850 1700,-800 v1(2050,-800)
inp8m9: pad.10 U8.3 U9.2 | length 2431
  Top Layer 1 w10: pad.10 200,-1200 U9.2 ; v1(2000,-850) U8.3
  Top Layer w10: pad.10 310,-990 1535,-990 1675,-850 v1(2000,-850)
inp9m10: pad.9 U9.3 U10.2 | length 1031.7
  Top Layer 1 w10: v1(275,-1250) U9.3 ; v1(900,-1200) U10.2
  Top Layer w10: pad.9 v1(275,-1250) 500,-1250 550,-1200 v1(900,-1200)
inp10m11: pad.8 U10.3 U11.2 | length 1648.2
  Top Layer 1 w10: v1(850,-1250) U10.3 ; v1(1475,-1200) U11.2
  Top Layer w10: pad.8 425,-1350 525,-1250 v1(850,-1250) 1075,-1250 1125,-1200 v1(1475,-1200)
inp11m12: pad.7 U11.3 U12.2 | length 2264.6
  Top Layer 1 w10: v1(1425,-1250) U11.3 ; v1(2050,-1200) U12.2
  Top Layer w10: pad.7 230,-1370 980,-1370 1100,-1250 v1(1425,-1250) 1650,-1250 1700,-1200 v1(2050,-1200)
inp12m13: pad.6 U12.3 U13.2 | length 2431
  Top Layer 1 w10: pad.6 200,-1600 U13.2 ; v1(2000,-1250) U12.3
  Top Layer w10: pad.6 310,-1390 1535,-1390 1675,-1250 v1(2000,-1250)
inp13m14: pad.5 U13.3 U14.2 | length 1031.7
  Top Layer 1 w10: v1(275,-1650) U13.3 ; v1(900,-1600) U14.2
  Top Layer w10: pad.5 v1(275,-1650) 500,-1650 550,-1600 v1(900,-1600)
inp14m15: pad.4 U14.3 U15.2 | length 1648.2
  Top Layer 1 w10: v1(850,-1650) U14.3 ; v1(1475,-1600) U15.2
  Top Layer w10: pad.4 425,-1750 525,-1650 v1(850,-1650) 1075,-1650 1125,-1600 v1(1475,-1600)
inp15m16: pad.3 U15.3 U16.2 | length 2264.6
  Top Layer 1 w10: v1(1425,-1650) U15.3 ; v1(2050,-1600) U16.2
  Top Layer w10: pad.3 230,-1770 980,-1770 1100,-1650 v1(1425,-1650) 1650,-1650 1700,-1600 v1(2050,-1600)
inp16: pad.2 U16.3 | length 2129.8
  Top Layer 1 w10: v1(2000,-1650) U16.3
  Top Layer w10: pad.2 310,-1790 1535,-1790 1675,-1650 v1(2000,-1650)
mcuGND: C13.1 C19.1 C32.1 C48.1 C64.1 CA.1 CB.1 CEN.1 Cm.1 ICESP.1 ICESP.15 ICESP.38 ICESP.39 ICESP.40 ICESP.41 ICESP.42 ICESP.43 ICESP.44 ICESP.45 ICESP.46 ICESP.47 OPTO1.1 OPTO1.5 OPTO1.7 OPTO2.1 OPTO2.5 OPTO2.7 pad.18 pad.23 R23.1 R24.1 USTM.12 USTM.18 USTM.31 USTM.47 USTM.63 | length 12348.4
  Top Layer 1 w10: CB.1 v1(1550,-4005) 1550,-4040 1560,-4050 1900,-4050 ; v1(1550,-3650) CEN.1 1550,-3295 1558.03,-3286.97 ; Cm.1 1550,-3278.94 1558.03,-3286.97 ; v1(1725,-2650) 1725,-2640 1685,-2600 1685,-2560 1705,-2540 1745,-2540 1797.95,-2592.95 USTM.47 ; ICESP.1 1558.03,-3286.97 ; ICESP.15 1910,-3977.95 1910,-4040 1900,-4050 ; USTM.31 1957.05,-2142.95 v1(2000,-2100) ; R24.1 R23.1 1945,-4095 1900,-4050 ; ICESP.47 ICESP.44 ICESP.45 ; ICESP.43 ICESP.42 ICESP.41 ICESP.40 ICESP.39 ICESP.46 ICESP.45 ; USTM.63 2213.3,-2693.69 2213.3,-2813.3 C64.1 ; USTM.18 2213.3,-2236.31 2213.3,-2196.7 2225,-2185 v1(2350,-2185) ; v1(2215,-3175) 2215,-3464.49 ICESP.45 ; USTM.12 2421.1,-2396.1 v1(2435,-2410) ; ICESP.38 2538.03,-3286.97 2550,-3275 v1(2550,-3175) 2700,-3175 2725,-3200 v1(2750,-3200) ; v1(2825,-2595) OPTO1.7 ; v1(2825,-2495) OPTO1.5 ; v1(2825,-2295) OPTO1.1 ; v1(2825,-2095) OPTO2.7 ; v1(2825,-1995) OPTO2.5 ; v1(2825,-1795) OPTO2.1 ; v1(2850,-3700) pad.18 ; v1(2850,-3200) 3150,-3200 3250,-3100 pad.23
  Top Layer w10: v1(2215,-3175) C64.1
  Bottom Layer 1 w10: CA.1 CB.1 ; v1(1550,-4005) v1(1550,-3650) ; v1(1725,-2650) C48.1 1565,-2880 1550,-2895 Cm.1 v1(2215,-3175) v1(2550,-3175) ; v1(2000,-2100) C32.1 ; C64.1 2425,-2815 2435,-2805 C13.1 v1(2435,-2410) v1(2825,-2410) ; C19.1 2235,-2035 2300,-2100 v1(2350,-2100) ; v1(2350,-2185) v1(2350,-2100) ; v1(2750,-3200) v1(2850,-3200) v1(2850,-3700) ; v1(2825,-2595) v1(2825,-2495) v1(2825,-2410) ; v1(2825,-1795) v1(2825,-1995) ; v1(2350,-2100) 2350,-1965 2365,-1950 2780,-1950 v1(2825,-1995) ; v1(2825,-2410) v1(2825,-2295) v1(2825,-2095) v1(2825,-1995)
NetCEN_2: CEN.2 ICESP.3 Ren.2 | length 995.7
  Top Layer 1 w10: Ren.2 1045,-3370 1060,-3385 CEN.2 ; v1(1675,-3425) 1675,-3395 1683.03,-3386.97 ICESP.3
  Top Layer w10: CEN.2 1250,-3415 1260,-3425 v1(1675,-3425)
NetICESP_23: ICESP.23 R23.2 | length 123.5
  Top Layer 1 w10: R23.2 2300,-4045 2311.61,-4033.39 ICESP.23
NetICESP_24: ICESP.24 R24.2 | length 333.5
  Top Layer 1 w10: R24.2 2350,-4255 2361.61,-4243.39 ICESP.24
NetICESP_25: ICESP.25 R25.1 | length 119.6
  Top Layer 1 w10: ICESP.25 2473.23,-3935 R25.1
NetR60_1: R60.1 USTM.60 | length 247.1
  Top Layer 1 w10: USTM.60 2154.24,-2693.69 2154.24,-2939.24 R60.1
out1: ADC1.4 U1.6 | length 3074.9
  Top Layer 1 w10: U1.6 775,-450 925,-600 2395,-600 2570,-425 3350,-425 3362.5,-437.5 ADC1.4
out2: ADC1.3 U2.6 | length 2542.5
  Top Layer 1 w10: U2.6 1350,-450 1475,-575 2385,-575 2560,-400 3380,-400 3387.5,-407.5 ADC1.3
out3: ADC1.2 U3.6 | length 2004.2
  Top Layer 1 w10: U3.6 1925,-450 2025,-550 2375,-550 2550,-375 3400,-375 3412.5,-387.5 ADC1.2
out4: ADC1.1 U4.6 | length 1406.7
  Top Layer 1 w10: U4.6 2400,-450 2500,-350 3425,-350 3437.5,-362.5 ADC1.1
out5: ADC1.8 U5.6 | length 3081.4
  Top Layer 1 w10: U5.6 770,-850 920,-1000 2395,-1000 2550,-845 2550,-710 2760,-500 3195,-500 3262.5,-567.5 ADC1.8
out6: ADC1.7 U6.6 | length 2537.3
  Top Layer 1 w10: U6.6 1350,-850 1475,-975 2385,-975 2525,-835 2525,-700 2750,-475 3205,-475 3287.5,-557.5 ADC1.7
out7: ADC1.6 U7.6 | length 2505.1
  Top Layer 1 w10: U7.6 1925,-850 2025,-950 2375,-950 2500,-825 2500,-560 2535,-525 v1(2575,-525) ; v1(3300,-500) 3300,-510.82 3312.5,-523.32 ADC1.6
  Bottom Layer w10: v1(2575,-525) 2575,-490 2645,-420 2950,-420 2975,-395 2975,-275 3000,-250 3300,-250 3315,-265 3315,-485 v1(3300,-500)
out8: ADC1.5 U8.6 | length 1465.7
  Top Layer 1 w10: U8.6 2400,-850 2475,-775 2475,-550 2575,-450 3330,-450 3337.5,-457.5 ADC1.5
out9: ADC2.4 U9.6 | length 3077.8
  Top Layer 1 w10: U9.6 775,-1250 925,-1400 2395,-1400 2570,-1225 3355,-1225 3362.5,-1232.5 ADC2.4
out10: ADC2.3 U10.6 | length 2542.5
  Top Layer 1 w10: U10.6 1350,-1250 1475,-1375 2385,-1375 2560,-1200 3380,-1200 3387.5,-1207.5 ADC2.3
out11: ADC2.2 U11.6 | length 2004.2
  Top Layer 1 w10: U11.6 1925,-1250 2025,-1350 2375,-1350 2550,-1175 3400,-1175 3412.5,-1187.5 ADC2.2
out12: ADC2.1 U12.6 | length 1406.7
  Top Layer 1 w10: U12.6 2400,-1250 2500,-1150 3425,-1150 3437.5,-1162.5 ADC2.1
out13: ADC2.8 U13.6 | length 3078.5
  Top Layer 1 w10: U13.6 775,-1650 925,-1800 2395,-1800 2550,-1645 2550,-1510 2760,-1300 3190,-1300 3262.5,-1372.5 ADC2.8
out14: ADC2.7 U14.6 | length 2534.3
  Top Layer 1 w10: U14.6 1350,-1650 1475,-1775 2385,-1775 2525,-1635 2525,-1500 2750,-1275 3200,-1275 3287.5,-1362.5 ADC2.7
out15: ADC2.6 U15.6 | length 2502.2
  Top Layer 1 w10: U15.6 1925,-1650 2025,-1750 2375,-1750 2500,-1625 2500,-1365 2540,-1325 v1(2575,-1325) ; v1(3300,-1300) 3300,-1310.82 3312.5,-1323.32 ADC2.6
  Bottom Layer w10: v1(2575,-1325) 2575,-1290 2645,-1220 2950,-1220 2975,-1195 2975,-1075 3000,-1050 3300,-1050 3315,-1065 3315,-1285 v1(3300,-1300)
out16: ADC2.5 U16.6 | length 1462.8
  Top Layer 1 w10: U16.6 2400,-1650 2475,-1575 2475,-1355 2580,-1250 3330,-1250 3337.5,-1257.5 ADC2.5
spi1CLK: OPTO1.8 USTM.21 | length 1613.5
  Top Layer 1 w10: USTM.21 2153.9,-2111.1 2240,-2025 2585,-2025 2600,-2040 v1(2600,-2100) ; v1(2600,-2645) OPTO1.8
  Top Layer w10: v1(2600,-2645) v1(2600,-2100)
spi1MISO: OPTO1.2 USTM.22 | length 1427.3
  Top Layer 1 w10: USTM.22 2134.21,-2100.79 2160,-2075 v1(2160,-2000) ; v1(2675,-2345) OPTO1.2
  Top Layer w10: v1(2675,-2345) v2(2675,-2000)
  Bottom Layer w10: v1(2160,-2000) v2(2675,-2000)
spi1MOSI: OPTO1.4 USTM.23 | length 1451.8
  Top Layer 1 w10: USTM.23 2114.53,-2055.47 v1(2115,-2055) ; v1(2725,-2445) OPTO1.4
  Top Layer w10: v1(2725,-2445) v2(2725,-2055)
  Bottom Layer w10: v1(2115,-2055) v2(2725,-2055)
spi2CLK: OPTO2.8 USTM.29 | length 1074.4
  Top Layer 1 w10: USTM.29 1996.42,-2173.58 2025,-2145 v1(2050,-2145) ; v1(2775,-2145) OPTO2.8
  Bottom Layer w10: v1(2050,-2145) v1(2775,-2145)
spi2MISO: OPTO2.2 USTM.10 | length 1561.8
  Top Layer 1 w10: USTM.10 2360.47,-2435.47 2375,-2450 2375,-2585 2390,-2600 2765,-2600 2775,-2590 v1(2775,-2545) ; v1(2875,-1845) OPTO2.2
  Top Layer w10: v1(2775,-2545) v2(2775,-2225)
  Bottom Layer w10: v2(2775,-2225) 2925,-2075 2925,-2015 2875,-1965 v1(2875,-1845)
spi2MOSI: OPTO2.4 USTM.11 | length 1174.9
  Top Layer 1 w10: USTM.11 2365.79,-2415.79 2400,-2450 2615,-2450 2625,-2440 2625,-2140 2645,-2120 2645,-2030 2635,-2020 2635,-1985 2675,-1945 OPTO2.4
spi3CLK: ICESP.30 USTM.51 | length 2018.7
  Top Layer 1 w10: v1(1850,-2950) 1976.73,-2823.27 USTM.51 ; ICESP.30 2473.23,-3685 v1(2750,-3685)
  Top Layer w10: v1(2750,-3685) v2(2750,-3300)
  Bottom Layer w10: v1(1850,-2950) 2025,-3125 2575,-3125 v2(2750,-3300)
spi3MISO: ICESP.31 USTM.52 | length 1787.9
  Top Layer 1 w10: v1(1925,-2950) 1996.42,-2878.58 USTM.52 ; ICESP.31 2473.23,-3635 v1(2650,-3635)
  Top Layer w10: v1(2650,-3635) v2(2650,-3100)
  Bottom Layer w10: v1(1925,-2950) 2075,-3100 v2(2650,-3100)
spi3MOSI: ICESP.37 USTM.53 | length 1319.3
  Top Layer 1 w10: v1(2000,-2950) 2016.1,-2933.9 USTM.53 ; ICESP.37 2473.23,-3335 v1(2600,-3335)
  Top Layer w10: v1(2600,-3335) v2(2600,-3050)
  Bottom Layer w10: v1(2000,-2950) 2100,-3050 v2(2600,-3050)
STMuartRX: pad.22 USTM.43 | length 2701.1
  Top Layer 1 w10: v1(1600,-2550) 1635.79,-2514.21 USTM.43 ; v1(2900,-3300) 3150,-3300 3250,-3200 pad.22
  Bottom Layer w10: v1(1600,-2550) 1600,-2825 2000,-3225 2600,-3225 2725,-3350 2775,-3350 2825,-3300 v1(2900,-3300)
STMuartTX: pad.21 USTM.42 | length 2844.6
  Top Layer 1 w10: v1(1525,-2550) 1580.47,-2494.53 USTM.42 ; v1(2900,-3400) 3150,-3400 3250,-3300 pad.21
  Bottom Layer w10: v1(1525,-2550) 1525,-2800 2000,-3275 2600,-3275 2725,-3400 v1(2900,-3400)
Vbat: CBA.2 CTA.2 Rs1.1 U3V3.1 U5V.1 Vbat.1 | length 2210.4
  Top Layer 1 w10: Rs1.1 Vbat.1 ; U5V.1 526.14,-2793.86 500,-2820 CTA.2 500,-2940 490,-2950 310,-2950 300,-2960 Vbat.1 ; U3V3.1 v1(650,-4130) ; v1(650,-3475) 650,-3360 640,-3350 CBA.2 500,-3310 490,-3300 310,-3300 300,-3290 Vbat.1
  Top Layer w10: v1(650,-4130) v1(650,-3475)
Vcc: ADC1.10 ADC1.11 ADC1.12 ADC1.20 ADC2.10 ADC2.11 ADC2.12 ADC2.20 C1.2 C2.2 C3.2 C4.2 C5.2 C6.2 C7.2 C8.2 CTB.2 D1.2 R1.2 R60.2 U1.7 U2.7 U3.7 U4.7 U5.7 U5V.13 U6.7 U7.7 U8.7 U9.7 U10.7 U11.7 U12.7 U13.7 U14.7 U15.7 U16.7 | length 22786.5
  Top Layer 1 w10: U5V.13 D1.2 865,-2165 875,-2175 875,-2330 885,-2340 CTB.2 R1.2 ; U13.7 675,-1600 700,-1575 v1(700,-1500) ; U9.7 675,-1200 700,-1175 v1(700,-1100) ; U5.7 675,-800 700,-775 v1(700,-700) ; U1.7 675,-400 700,-375 v1(700,-300) v1(1275,-300) ; U14.7 1250,-1600 1275,-1575 v1(1275,-1500) ; U10.7 1250,-1200 1275,-1175 v1(1275,-1100) ; U6.7 1250,-800 1275,-775 v1(1275,-700) ; U2.7 1250,-400 1275,-375 v1(1275,-300) ; U15.7 1825,-1600 1850,-1575 v1(1850,-1500) ; U11.7 1825,-1200 1850,-1175 v1(1850,-1100) ; U7.7 1825,-800 1850,-775 v1(1850,-700) ; U3.7 1825,-400 1850,-375 v1(1850,-300) ; U16.7 2400,-1600 2425,-1575 v1(2425,-1500) ; U12.7 2400,-1200 2425,-1175 v1(2425,-1100) ; U8.7 2400,-800 2425,-775 v1(2425,-700) ; U4.7 2400,-400 2425,-375 v1(2425,-300) ; C6.2 C5.2 v1(2425,-1100) ; C2.2 C1.2 v1(2425,-300) ; C8.2 C7.2 2840,-1050 2475,-1050 v1(2425,-1100) ; C4.2 C3.2 2840,-250 2475,-250 v1(2425,-300) ; v1(3100,-1525) 3100,-1445 3115,-1430 3212.11,-1430 ADC2.10 ; v1(3100,-725) 3100,-645 3115.39,-629.61 ADC1.10 ; v1(3150,-1675) 3194.61,-1630.39 ADC2.11 ; v1(3150,-875) 3194.61,-830.39 ADC1.11 ; v1(3235,-1725) 3237.5,-1722.5 ADC2.12 ; v1(3235,-925) 3237.5,-922.5 ADC1.12 ; ADC2.20 3437.5,-1687.5 v1(3475,-1725) ; ADC1.20 3437.5,-887.5 v1(3475,-925) ; v1(1275,-300) v1(1850,-300) ; v1(1850,-300) v1(2425,-300)
  Top Layer w10: v1(700,-300) v2(750,-250) ; R1.2 v2(1100,-1850) ; R60.2 2455,-2695 2475,-2675 v2(2475,-1800) ; C6.2 v2(2720,-1300) 2945,-1525 v1(3100,-1525) ; C2.2 v2(2720,-500) 2945,-725 v1(3100,-725) ; v1(3235,-1725) v1(3475,-1725) ; v1(3235,-925) v1(3475,-925)
  Bottom Layer w10: v1(700,-1500) v1(700,-1100) v1(700,-700) v1(700,-300) ; v2(750,-250) 750,-1840 760,-1850 v2(1100,-1850) 1100,-1810 1110,-1800 v2(2475,-1800) ; v1(1275,-1500) v1(1275,-1100) v1(1275,-700) v1(1275,-300) ; v1(1850,-1500) v1(1850,-1100) v1(1850,-700) v1(1850,-300) ; v1(2425,-1500) v1(2425,-1100) v1(2425,-700) v1(2425,-300) ; v2(2720,-1300) 2825,-1405 2825,-1710 2840,-1725 v1(3235,-1725) ; v2(2720,-500) 2825,-605 2825,-910 2840,-925 v1(3235,-925) ; C8.2 3140,-1100 3150,-1110 v1(3150,-1675) ; C4.2 3140,-300 3150,-310 v1(3150,-875)
Vdd: C13.2 C19.2 C32.2 C48.2 C64.2 CA.2 CB.2 CBB.2 Cm.2 D2.2 ICESP.2 OPTO1.3 OPTO1.10 OPTO2.3 OPTO2.10 pad.24 R25.2 Ren.1 Rs1.2 Rs2.1 U3V3.13 USTM.13 USTM.19 USTM.32 USTM.48 USTM.64 | length 16201.2
  Top Layer 1 w10: U3V3.13 D2.2 940,-3530 950,-3540 950,-3695 960,-3705 CBB.2 ; Rs1.2 Rs2.1 970,-3490 985,-3505 Ren.1 ; Cm.2 1250,-3235 1300,-3285 1300,-3490 1285,-3505 Ren.1 ; v1(1600,-3950) 1600,-3710.86 1594.14,-3705 ; C48.2 1757.64,-2612.64 USTM.48 ; ICESP.2 1608.03,-3336.97 1600,-3345 1600,-3699.14 1594.14,-3705 ; C32.2 1937.36,-2102.36 USTM.32 ; C19.2 1935,-1865 1950,-1850 v1(2425,-1850) ; USTM.19 2193.27,-2156.73 2205,-2145 2385,-2145 2425,-2105 v1(2425,-2100) ; USTM.64 2503.35,-2693.35 2515,-2705 C64.2 ; USTM.13 2313.46,-2376.31 2348.39,-2376.31 2379.7,-2345 C13.2 v1(2550,-2345) ; v1(2800,-3000) 2825,-3000 3050,-2775 3475,-2775 3500,-2750 v1(3500,-2595) OPTO1.10 ; v1(2925,-2395) OPTO1.3 ; v1(2925,-2200) v1(3500,-2200) ; v1(2925,-1895) OPTO2.3 ; OPTO2.10 v1(3500,-2095) ; v1(3250,-3400) pad.24 ; CBB.2 Ren.1 ; CBB.2 CA.2 CB.2 1594.14,-3705
  Top Layer w10: Cm.2 1490,-3175 1500,-3165 1500,-2950 1525,-2925 1750,-2925 1775,-2900 v2(1775,-2700) 1775,-2630 C48.2 ; v1(1600,-3950) 1600,-4185 1615,-4200 2555,-4200 R25.2 ; v1(2425,-2100) v1(2425,-1850) ; C64.2 2550,-2780 v1(2550,-2345) ; v1(2800,-3505) v1(2800,-3000) ; v1(2925,-2395) v1(2925,-2200) v1(2925,-1895)
  Bottom Layer w10: Ren.1 v1(2800,-3505) 3075,-3505 3180,-3400 v1(3250,-3400) ; v2(1775,-2700) 1850,-2700 1905,-2645 ; C32.2 1905,-2130 ; C19.2 1905,-1930 1905,-2130 ; C64.2 2345,-2645 1905,-2645 ; v1(3500,-2595) v1(3500,-2200) v1(3500,-2095) ; 1905,-2645 1905,-2130
Vref: R1.1 R2.2 U1.1 U2.1 U3.1 U4.1 U5.1 U6.1 U7.1 U8.1 U9.1 U10.1 U11.1 U12.1 U13.1 U14.1 U15.1 U16.1 | length 13008.9
  Top Layer 1 w10: v1(225,-1550) U13.1 ; v1(225,-1150) U9.1 ; v1(225,-750) U5.1 ; v1(225,-350) U1.1 ; v1(850,-1550) U14.1 ; v1(850,-1150) U10.1 ; v1(850,-750) U6.1 ; v1(850,-350) U2.1 ; R1.1 R2.2 ; v1(1425,-1550) U15.1 ; v1(1425,-1150) U11.1 ; v1(1425,-750) U7.1 ; v1(1425,-350) U3.1 ; v1(2000,-1550) U16.1 ; v1(2000,-1150) U12.1 ; v1(2000,-750) U8.1 ; v1(2000,-350) U4.1
  Top Layer w10: v1(225,-1550) v1(850,-1550) v1(1425,-1550) v1(2000,-1550) ; v1(225,-1150) v1(850,-1150) v1(1425,-1150) v1(2000,-1150) ; v1(225,-750) v1(850,-750) v1(1425,-750) v1(2000,-750) ; v1(225,-350) v1(850,-350) v1(1425,-350) v1(2000,-350)
  Bottom Layer w10: v1(225,-350) v1(225,-750) v1(225,-1150) v1(225,-1550) 225,-1740 235,-1750 565,-1750 575,-1760 575,-2090 585,-2100 1015,-2100 1025,-2110 1025,-2630 1035,-2640 R1.1
pads on no net: ADC1.16 ADC2.16 ICESP.4 ICESP.5 ICESP.6 ICESP.7 ICESP.8 ICESP.9 ICESP.10 ICESP.11 ICESP.12 ICESP.13 ICESP.14 ICESP.16 ICESP.17 ICESP.18 ICESP.19 ICESP.20 ICESP.21 ICESP.22 ICESP.26 ICESP.27 ICESP.28 ICESP.32 ICESP.33 ICESP.36 U1.5 U1.8 U2.5 U2.8 U3.5 U3.8 U3V3.14 U3V3.15 U3V3.16 U3V3.17 U3V3.26 U3V3.27 U3V3.28 U4.5 U4.8 U5.5 U5.8 U5V.14 U5V.15 U5V.16 U5V.17 U5V.26 U5V.27 U5V.28 U6.5 U6.8 U7.5 U7.8 U8.5 U8.8 U9.5 U9.8 U10.5 U10.8 U11.5 U11.8 U12.5 U12.8 U13.5 U13.8 U14.5 U14.8 U15.5 U15.8 U16.5 U16.8 USTM.1 USTM.2 USTM.3 USTM.4 USTM.5 USTM.6 USTM.7 USTM.8 USTM.9 USTM.14 USTM.15 USTM.16 USTM.17 USTM.20 USTM.24 USTM.25 USTM.26 USTM.27 USTM.28 USTM.30 USTM.33 USTM.34 USTM.35 USTM.36 USTM.37 USTM.38 USTM.39 USTM.40 USTM.41 USTM.44 USTM.45 USTM.46 USTM.49 USTM.50 USTM.54 USTM.55 USTM.56 USTM.61 USTM.62

## Keep-outs
Keep-Out Layer:
  the board outline again, w200

## Silkscreen, mask and mechanical layers (free items; w line width, h text height)
Top Overlay:
  text "STM_VTRG" at 3590,-3420 h60 r90
  text "ESP_TRG" at 3530,-3480 h60 r270

## Text inside footprints (layer, text, board x,y; h text height)
Vbat: Top Overlay "+" at 394.49,-3102.28 h45.28 r180